# EAGLE board imu_xz (EAGLE 4.11)
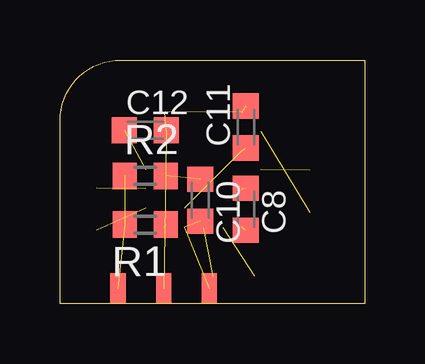
[diagram p0: board, top side]
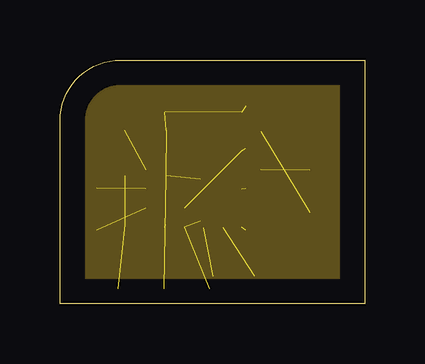
[diagram p1: board, inner layer Route2]
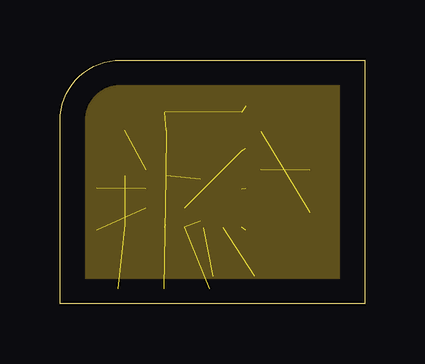
[diagram p2: board, inner layer Route15]
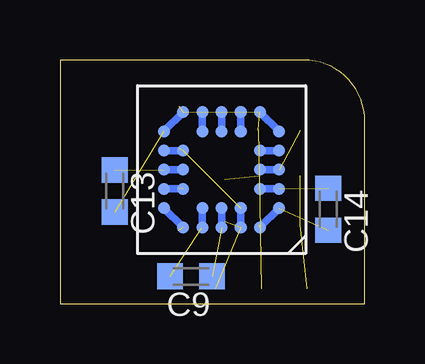
[diagram p3: board, bottom side, seen from below]

Size 12.7 x 10.16 mm. Coordinates in mm from the lower left corner, seen from the top.
Outline: 0,0 0,7.62 arc-90 2.54,10.16 12.7,10.16 12.7,0 0,0
Copper layers (1*16): Top 0.035mm / dielectric 1.5mm / Bottom 0.035mm
Design rules "default": minimum track width 10mil, minimum drill 24mil, track to track 8mil, track to pad 8mil, pad to pad 8mil, via to via 8mil, smd to smd 8mil, copper to edge 40mil, drill to drill 8mil, minimum pad ring 10mil, minimum via ring 8mil, stop-mask expansion 4mil, vias tented up to drill 0mil, thermal gap 10mil

## Footprints (pad centres in the part's own frame; a part is rotated, then mirrored left to right if it is on the bottom)
C0603K = smd 1.05 x 1.08: 1 -0.875,0; 2 0.875,0
BC-32 = smd 0.5 x 0.5: A2 -1.6,2.4; A3 -0.8,2.4; A4 0,2.4; A5 0.8,2.4; A6 1.6,2.4; B1 -2.4,1.6; B3 -0.8,1.6; B4 0,1.6; B5 0.8,1.6; B7 2.4,1.6; C1 -2.4,0.8; C2 -1.6,0.8; C6 1.6,0.8; C7 2.4,0.8; D1 -2.4,0; D2 -1.6,0; D6 1.6,0; D7 2.4,0; E1 -2.4,-0.8; E2 -1.6,-0.8; E6 1.6,-0.8; E7 2.4,-0.8; F1 -2.4,-1.6; F3 -0.8,-1.6; F4 0,-1.6; F5 0.8,-1.6; F7 2.4,-1.6; G2 -1.6,-2.4; G3 -0.8,-2.4; G4 0,-2.4; G5 0.8,-2.4; G6 1.6,-2.4
R0603 = smd 1 x 1.1: 1 -0.85,0; 2 0.85,0
SOLDER_PAD = smd 0.635 x 1.27: P$1 0,0

## Placement (x,y rotation side)
C8  22nF  [C0603K]  7.75,3.94 270 top
C9  22nF  [C0603K]  7.24,1.14 180 bottom
C10  100nF  [C0603K]  5.84,4.32 270 top
C11  100nF  [C0603K]  7.75,7.37 90 top
C12  100nF  [C0603K]  3.56,7.24 0 top
C13  47nF  [C0603K]  10.41,4.7 270 bottom
C14  22nF  [C0603K]  1.52,3.94 270 bottom
GYRO_Y  ADXR  [BC-32]  5.97,5.59 180 bottom
R1  [R0603]  3.56,3.3 180 top
R2  [R0603]  3.56,5.33 0 top
U$1  SOLDER_PAD  [SOLDER_PAD]  2.41,0.64 0 top
U$2  SOLDER_PAD  [SOLDER_PAD]  4.32,0.64 0 top
U$3  SOLDER_PAD  [SOLDER_PAD]  6.22,0.64 0 top

## Library data of the parts
C8-C14 R1 R2 = rcl
GYRO_Y U$1-U$3 = paparazzi

## Nets
+5V: C10.2 C11.1 GYRO_Y.A3 GYRO_Y.B3 GYRO_Y.E6 GYRO_Y.E7 U$3.P$1
GND: C10.1 C11.2 C12.2 C13.2 GYRO_Y.F1 GYRO_Y.F7 GYRO_Y.G2 GYRO_Y.G6 R2.2 U$2.P$1
N$6: C14.1 GYRO_Y.C1 GYRO_Y.C2
N$7: C8.1 GYRO_Y.C6 GYRO_Y.C7
N$11: C13.1 GYRO_Y.D6 GYRO_Y.D7
N$12: C9.2 GYRO_Y.A5 GYRO_Y.B5
N$13: C9.1 GYRO_Y.A4 GYRO_Y.B4
N$14: C8.2 GYRO_Y.A6 GYRO_Y.B7
N$17: GYRO_Y.E1 GYRO_Y.E2
N$19: C12.1 GYRO_Y.D1 GYRO_Y.D2
RATE_X: C14.2 GYRO_Y.A2 GYRO_Y.B1 R1.1
RATE_Y_3V3: R1.2 R2.1 U$1.P$1
ST1: GYRO_Y.F5 GYRO_Y.G5
ST2: GYRO_Y.F4 GYRO_Y.G4
TEMP_Y: GYRO_Y.F3 GYRO_Y.G3

## Tracks (layer width: path | path; a pad name or v marks a point on that pad's centre or on a via)
+5V  (4 unrouted)
  Bottom 0.305: 8.37,6.4 8.38,6.41 | GYRO_Y.E7 8.37,6.4 | GYRO_Y.E6 GYRO_Y.E7 8.37,6.4 | GYRO_Y.A3 5.14,3.18 | GYRO_Y.A3 | GYRO_Y.B3 5.17,3.2 GYRO_Y.A3
  pour Route15: 0.13,10.03 12.57,10.03 12.57,0.25 0.13,0.25
GND  (7 unrouted)
  Bottom 0.305: GYRO_Y.F7 8.38,7.18 | GYRO_Y.F7 | GYRO_Y.G6 | GYRO_Y.F7 GYRO_Y.G6 | GYRO_Y.G2 4.38,8 | GYRO_Y.G2 | GYRO_Y.F1 GYRO_Y.G2
  pour Route2: 0.13,10.03 12.57,10.03 12.57,0.25 0.13,0.25
N$6  (1 unrouted)
  Bottom 0.305: 4.37,4.78 4.38,4.76 | GYRO_Y.C2 4.37,4.78 | GYRO_Y.C1 GYRO_Y.C2 4.37,4.78
N$7  (1 unrouted)
  Bottom 0.305: 8.37,4.81 8.38,4.83 | GYRO_Y.C7 8.37,4.81 | GYRO_Y.C6 8.34,4.79 8.37,4.81
N$11  (1 unrouted)
  Bottom 0.305: 8.38,5.59 GYRO_Y.D7 GYRO_Y.D6
N$12  (1 unrouted)
  Bottom 0.305: 6.78,3.19 6.79,3.18 | 6.78,3.19 GYRO_Y.A5 | GYRO_Y.B5 6.77,3.2 6.78,3.19
N$13  (1 unrouted)
  Bottom 0.305: 5.97,3.18 GYRO_Y.A4 GYRO_Y.B4
N$14  (1 unrouted)
  Bottom 0.305: GYRO_Y.B7 8.38,4 | GYRO_Y.B7 | GYRO_Y.A6 | GYRO_Y.B7 GYRO_Y.A6
N$17
  Bottom 0.305: 4.37,6.4 4.38,6.41 | GYRO_Y.E2 4.37,6.4 | GYRO_Y.E1 GYRO_Y.E2 4.37,6.4
N$19  (1 unrouted)
  Bottom 0.305: 4.38,5.59 GYRO_Y.D2 GYRO_Y.D1
RATE_X  (2 unrouted)
  Bottom 0.305: GYRO_Y.A2 4.38,3.18 | GYRO_Y.A2 | GYRO_Y.B1 | GYRO_Y.A2 GYRO_Y.B1
RATE_Y_3V3  (2 unrouted)
ST1
  Bottom 0.305: GYRO_Y.F5 6.77,7.18 | 6.77,7.18 GYRO_Y.G5 | 6.77,7.18 6.79,7.18
ST2
  Bottom 0.305: GYRO_Y.F4 GYRO_Y.G4
TEMP_Y
  Bottom 0.305: GYRO_Y.F3 5.17,7.18 | 5.17,7.18 GYRO_Y.G3 | 5.17,7.18 5.14,7.18